# EAGLE board pcb_schematic_doorsecurity (EAGLE 9.6.2)
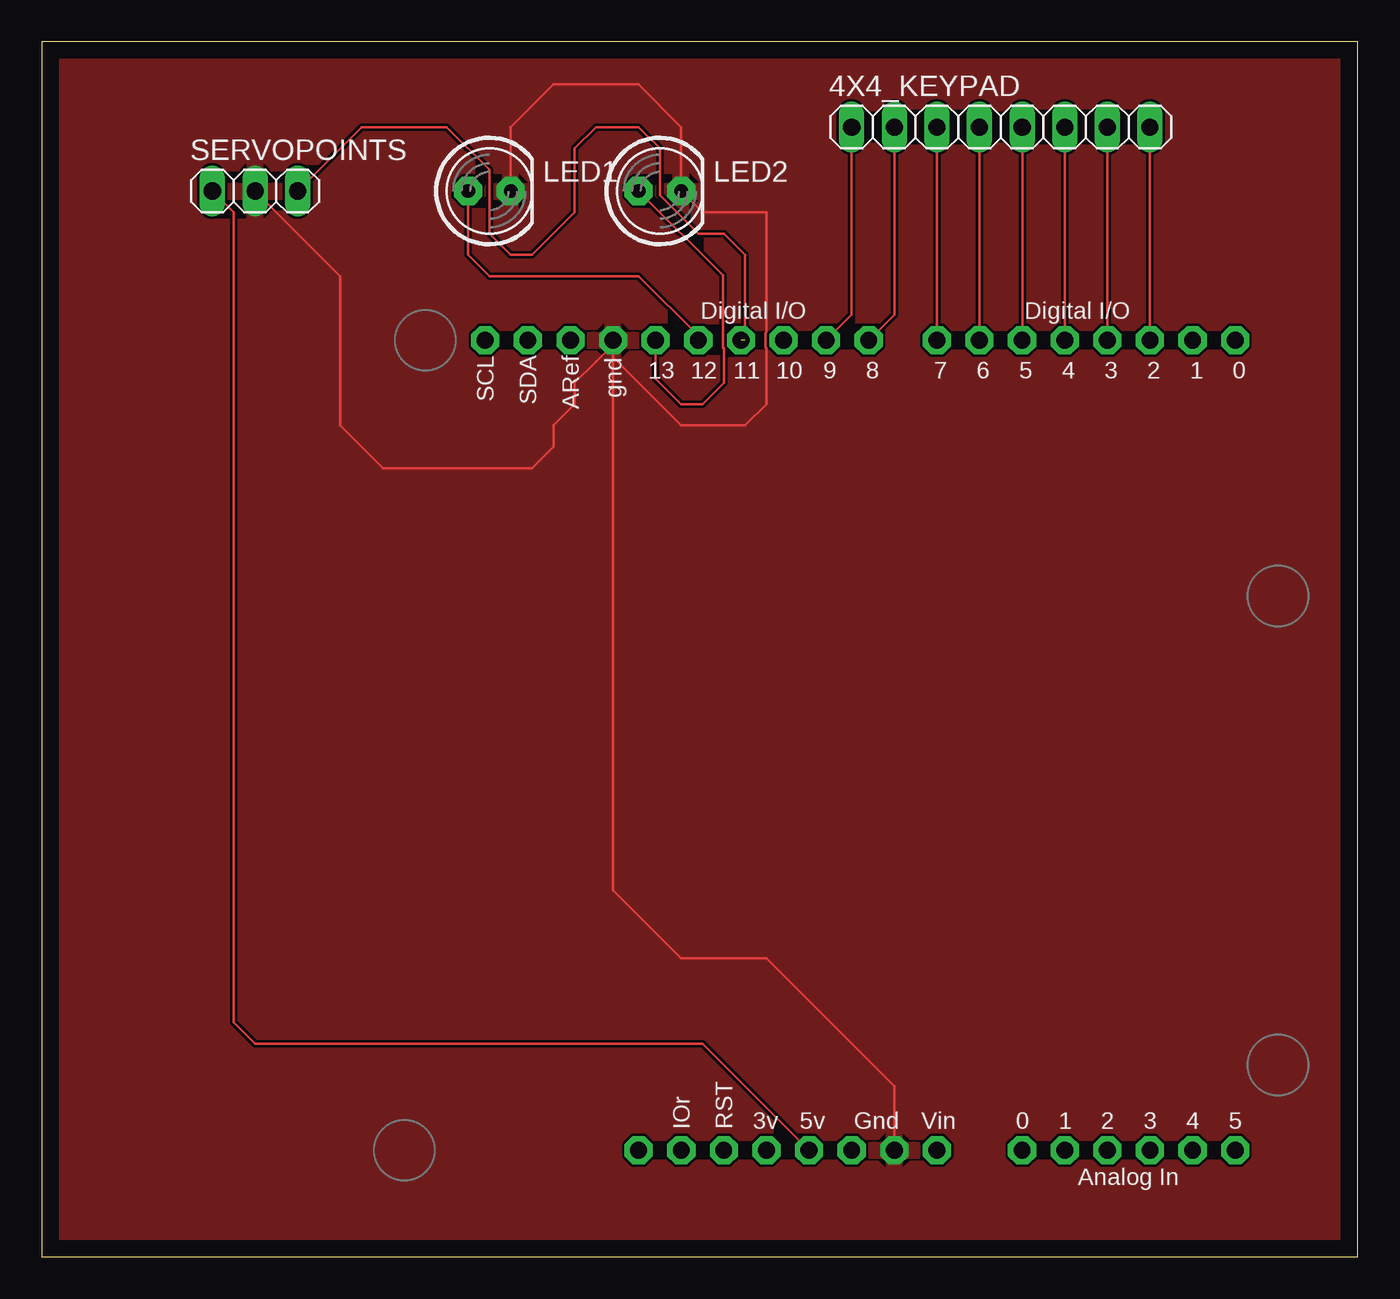
[diagram p0: board, top side]
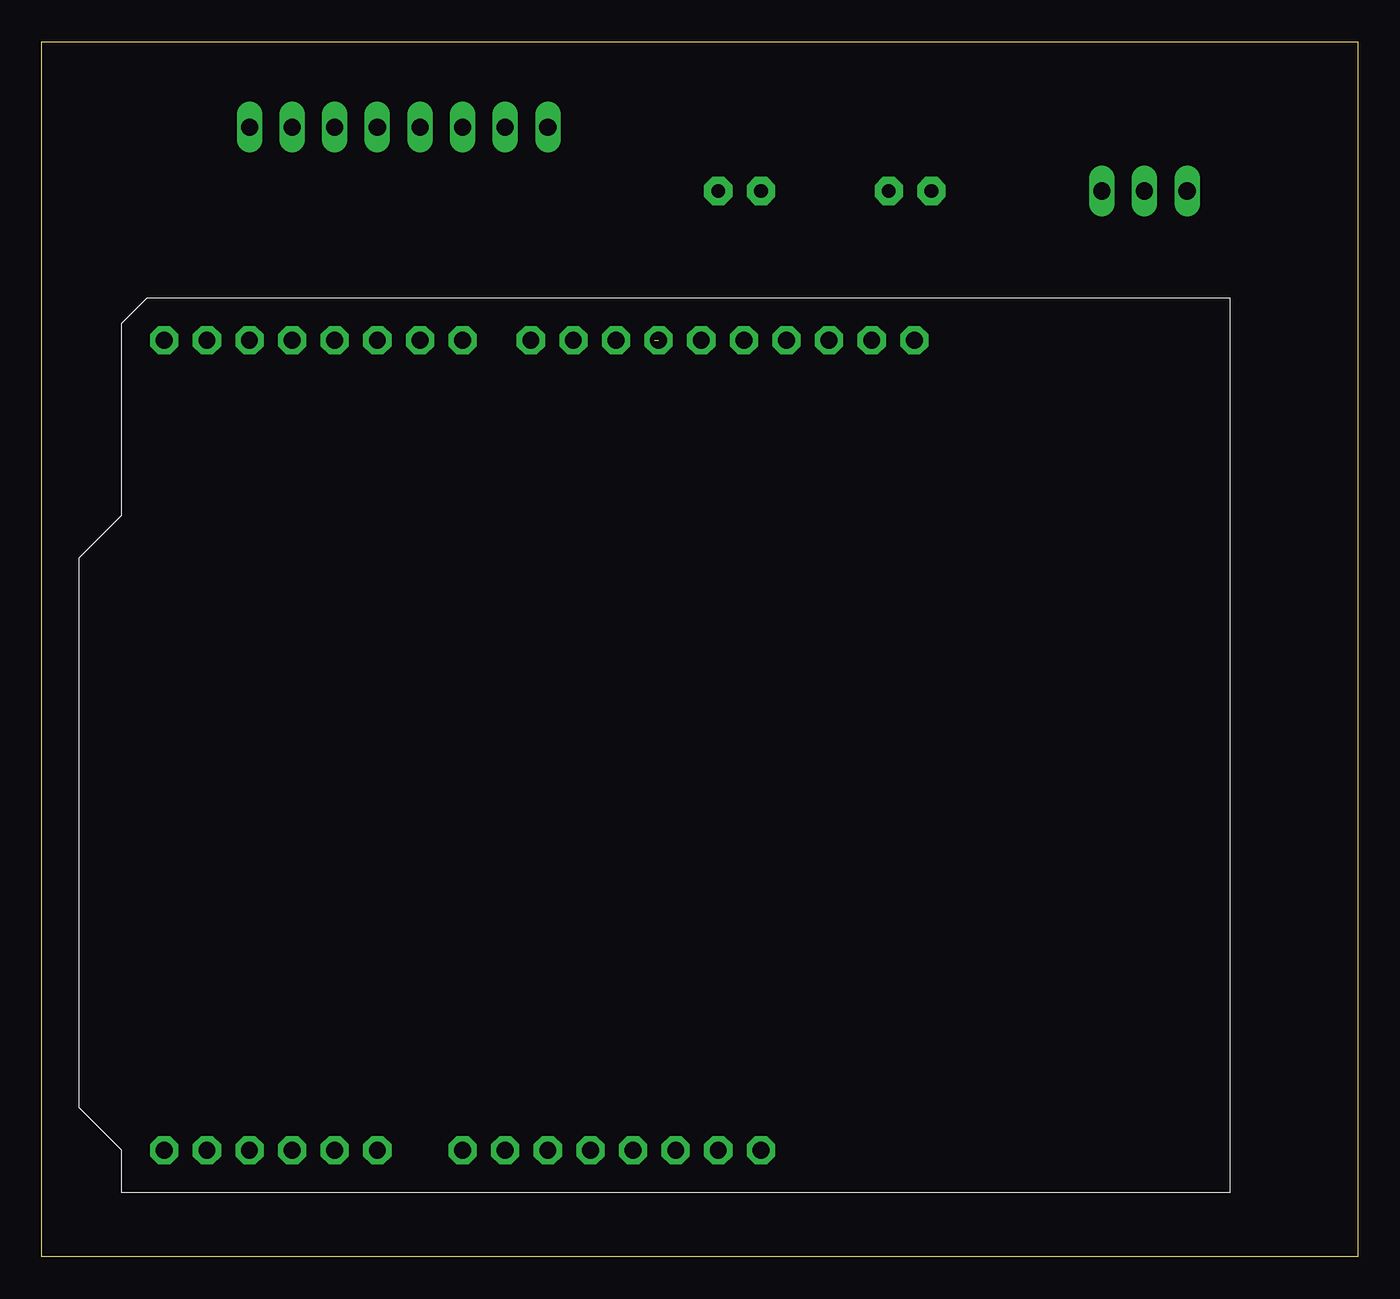
[diagram p1: board, bottom side, seen from below]

Size 78.41 x 72.38 mm. Coordinates in mm from the lower left corner, seen from the top.
Outline: 0,0 78.41,0 78.41,72.38 0,72.38 0,0
Copper layers (1*16): Top 0.035mm / dielectric 1.5mm / Bottom 0.035mm
Design rules "default": minimum track width 6mil, minimum drill 0.35mm, track to track 6mil, track to pad 6mil, pad to pad 6mil, via to via 6mil, smd to smd 6mil, copper to edge 40mil, drill to drill 6mil, minimum pad ring 10mil, minimum via ring 8mil, stop-mask expansion 4mil, vias tented up to drill 0mil, thermal gap 10mil

## Footprints (pad centres in the part's own frame; a part is rotated, then mirrored left to right if it is on the bottom)
1X08 = drill 1.016 long: 1 -8.89,0; 2 -6.35,0; 3 -3.81,0; 4 -1.27,0; 5 1.27,0; 6 3.81,0; 7 6.35,0; 8 8.89,0
LED5MM = drill 0.813 pad 1.676 octagon: A -1.27,0; K 1.27,0
1X03 = drill 1.016 long: 1 -2.54,0; 2 0,0; 3 2.54,0
ARDUINOR3-BPLACE = drill 1 pad 1.676 octagon: 3V 35.56,2.54; 5V 38.1,2.54; A0 50.8,2.54; A1 53.34,2.54; A2 55.88,2.54; A3 58.42,2.54; A4 60.96,2.54; A5 63.5,2.54; AREF 23.876,50.8; D0 63.5,50.8; D1 60.96,50.8; D2 58.42,50.8; D3 55.88,50.8; D4 53.34,50.8; D5 50.8,50.8; D6 48.26,50.8; D7 45.72,50.8; D8 41.656,50.8; D9 39.116,50.8; D10 36.576,50.8; D11 34.036,50.8; D12 31.496,50.8; D13 28.956,50.8; GND 26.416,50.8; GND1 43.18,2.54; GND2 40.64,2.54; IOREF 30.48,2.54; RESERVED 27.94,2.54; RESET 33.02,2.54; SCL 18.796,50.8; SDA 21.336,50.8; VIN 45.72,2.54

## Placement (x,y rotation side)
4X4_KEYPAD  PINHD-1X8  [1X08]  57.15,67.31 0 top
LED1  [LED5MM]  26.67,63.5 0 top
LED2  [LED5MM]  36.83,63.5 0 top
SERVOPOINTS  PINHD-1X3  [1X03]  12.7,63.5 0 top
U1  ARDUINOR3-BPLACE  [ARDUINOR3-BPLACE]  7.62,3.81 0 top

## Library data of the parts
4X4_KEYPAD SERVOPOINTS = Connector; CATEGORY: CONNECTOR; SUB-CATEGORY: PIN-HEADER
LED1 LED2 U1 = adafruit

## Nets
3V: U1.3V
5V: SERVOPOINTS.1 U1.5V
C1: 4X4_KEYPAD.5 U1.D5
C2: 4X4_KEYPAD.6 U1.D4
C3: 4X4_KEYPAD.7 U1.D3
C4: 4X4_KEYPAD.8 U1.D2
GND: LED1.K LED2.K SERVOPOINTS.2 U1.GND U1.GND1
GND2: U1.GND2
GREEN: LED2.A U1.D13
R1: 4X4_KEYPAD.1 U1.D9
R2: 4X4_KEYPAD.2 U1.D8
R3: 4X4_KEYPAD.3 U1.D7
R4: 4X4_KEYPAD.4 U1.D6
RED: LED1.A U1.D12
SIG: SERVOPOINTS.3 U1.D11
VIN: U1.VIN

## Tracks (layer width: path | path; a pad name or v marks a point on that pad's centre or on a via)
5V
  Top 0.152: SERVOPOINTS.1 11.43,62.23 11.43,13.97 12.7,12.7 39.37,12.7 U1.5V
C1
  Top 0.152: 4X4_KEYPAD.5 U1.D5
C2
  Top 0.152: 4X4_KEYPAD.6 U1.D4
C3
  Top 0.152: 4X4_KEYPAD.7 U1.D3
C4
  Top 0.152: 4X4_KEYPAD.8 U1.D2
GND
  Top 0.152: U1.GND 34.04,21.84 38.1,17.78 43.18,17.78 50.8,10.16 U1.GND1 | LED1.K 27.94,67.31 30.48,69.85 35.56,69.85 38.1,67.31 LED2.K 39.37,62.23 43.18,62.23 43.18,55.1 43.13,55.05 43.13,54.17 43.18,54.12 43.18,50.8 41.91,49.53 38.1,49.53 34.04,53.59 U1.GND | SERVOPOINTS.2 17.78,58.42 17.78,49.53 20.32,46.99 29.21,46.99 30.48,48.26 30.48,49.53 31.75,50.8 31.75,52.07 33.02,53.34 | 33.02,53.34 34.29,54.61 U1.GND | 33.02,53.34
  pour Top: 0,72.39 0,0 78.74,0 78.74,72.39
GREEN
  Top 0.152: LED2.A 40.59,58.47 40.59,54.17 40.64,54.12 40.64,52.07 39.37,50.8 38.1,50.8 36.58,52.32 U1.D13
R1
  Top 0.152: 4X4_KEYPAD.1 48.26,56.13 U1.D9
R2
  Top 0.152: 4X4_KEYPAD.2 50.8,56.13 U1.D8
R3
  Top 0.152: 4X4_KEYPAD.3 U1.D7
R4
  Top 0.152: 4X4_KEYPAD.4 U1.D6
RED
  Top 0.152: U1.D12 39.12,54.86 35.56,58.42 26.67,58.42 25.4,59.69 LED1.A
SIG  (1 unrouted)
  Top 0.152: SERVOPOINTS.3 19.05,67.31 24.13,67.31 26.67,64.77 26.67,60.96 27.94,59.69 29.21,59.69 31.75,62.23 31.75,66.04 33.02,67.31 35.56,67.31 36.83,66.04 36.83,63.26 39.13,60.96 40.64,60.96 41.91,59.69 41.91,54.61